# EAGLE board Chronograph Rough Draft Schematic (EAGLE 9.5.1)
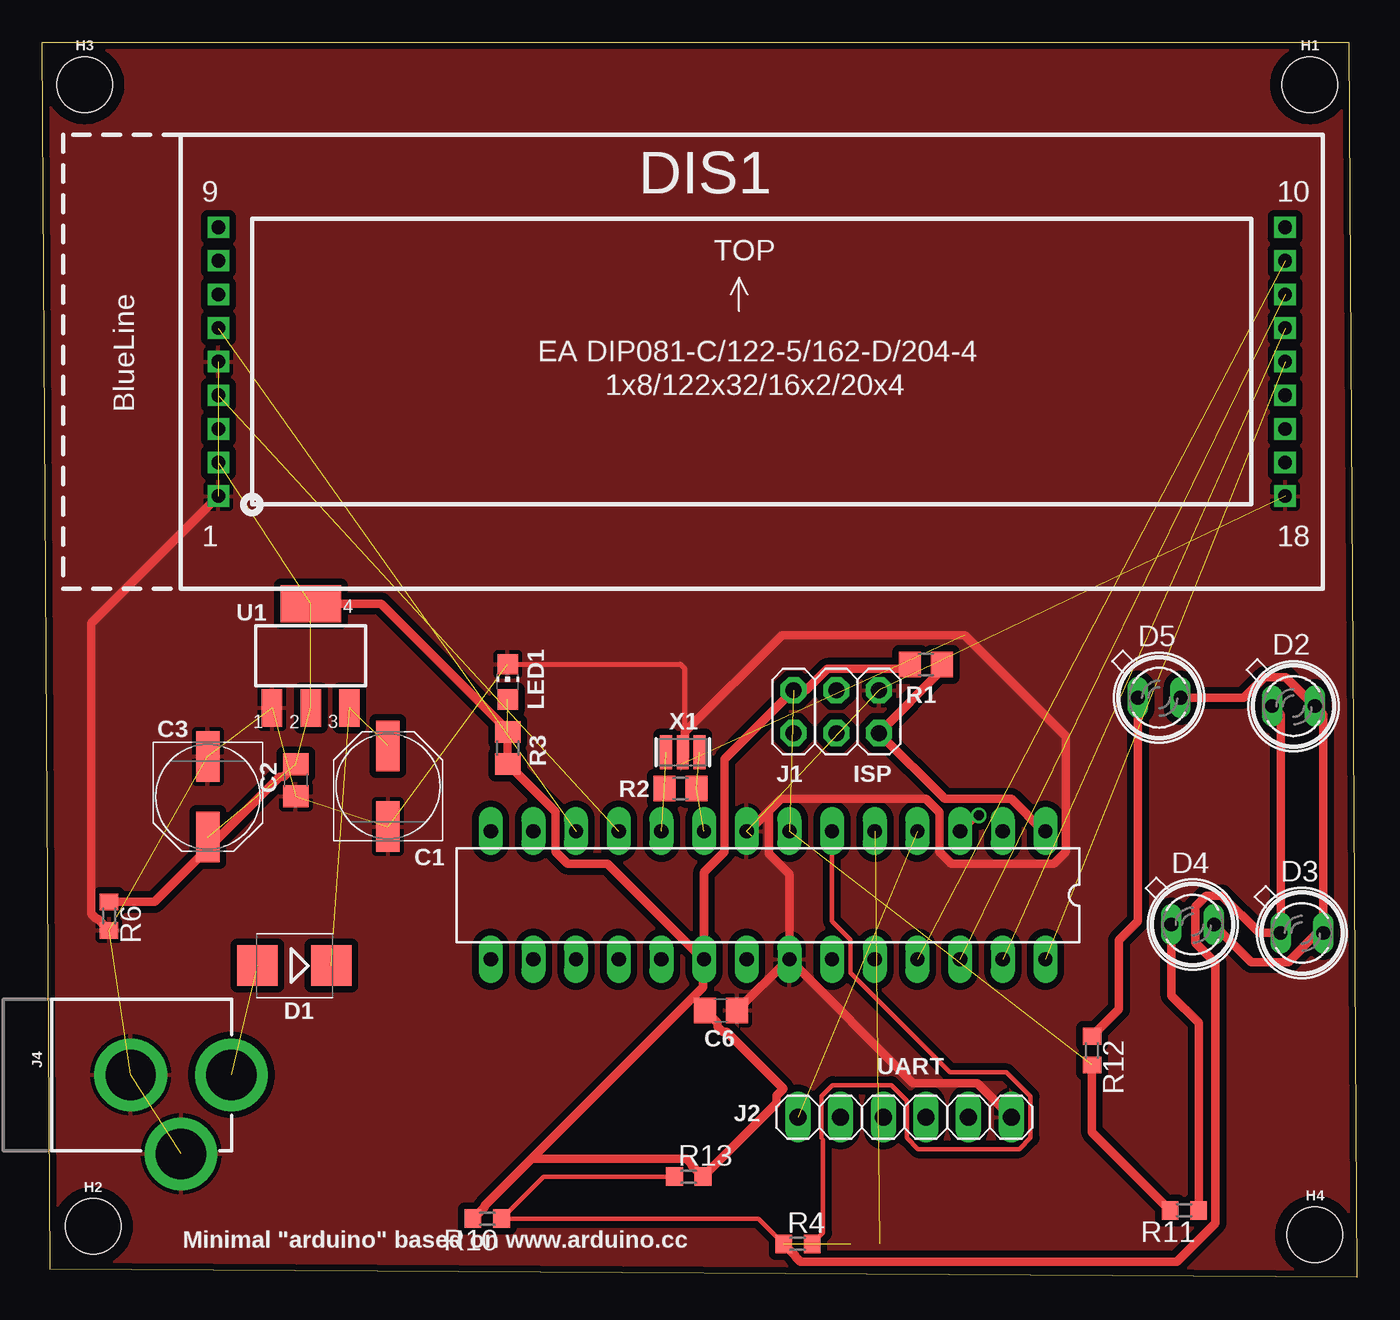
[diagram p0: board, top side]
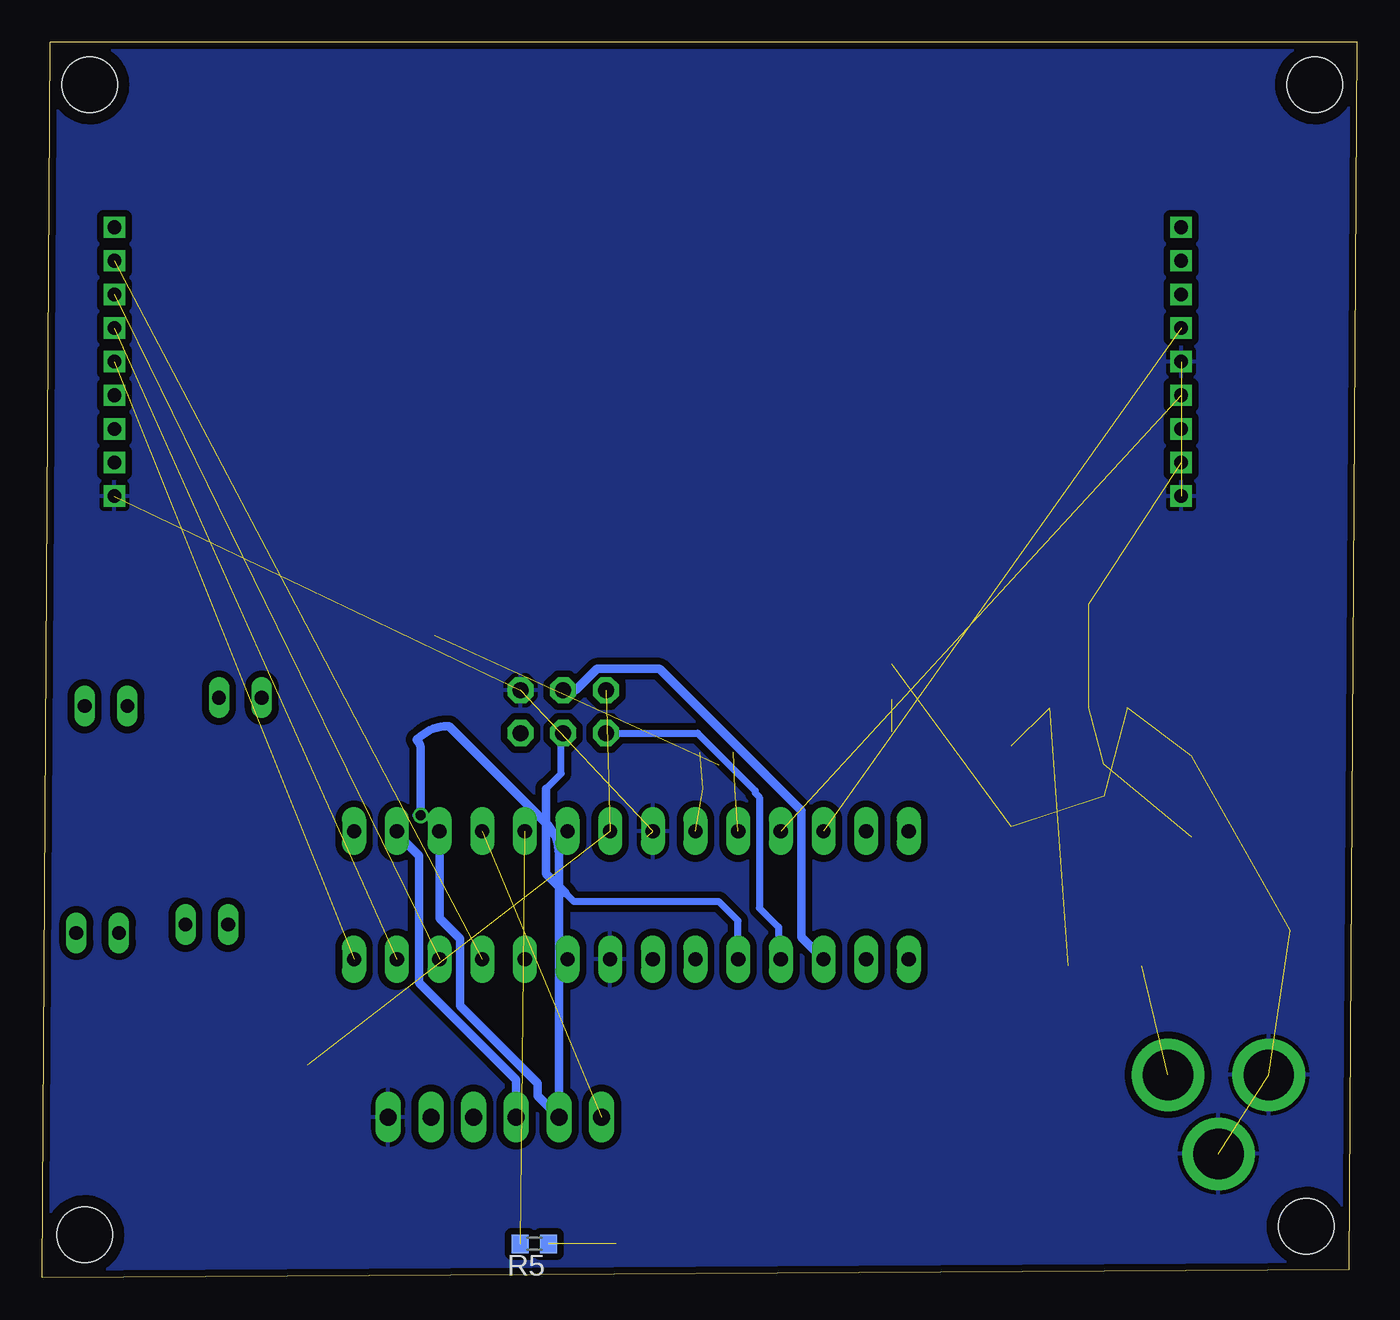
[diagram p1: board, bottom side, seen from below]

Size 78.31 x 73.52 mm. Coordinates in mm from the lower left corner, seen from the top.
Outline: 0.5,0.5 0,73.52 77.81,73.52 78.31,0 0.5,0.5
Copper layers (1*16): Top 0.035559375mm / dielectric 1.6mm / Bottom 0.035559375mm
Design rules "oshpark-2layer": minimum track width 6mil, minimum drill 10mil, track to track 6mil, track to pad 6mil, pad to pad 6mil, via to via 6mil, smd to smd 6mil, copper to edge 15mil, drill to drill 6mil, minimum pad ring 5mil, minimum via ring 5mil, stop-mask expansion 2.5mil, vias tented up to drill 0mil, thermal gap 10mil
Net classes: 0 default: width 0.254 mm, clearance 0.254 mm; 1 power: width 0.61 mm, drill 0.61 mm, clearance 0.254 mm; 2 gnd: width 0.305 mm, drill 0.559 mm, clearance 0.254 mm; 3 usbvcc: width 0.508 mm, drill 0.61 mm, clearance 0.254 mm; 4 aref: width 0.406 mm, drill 0.61 mm, clearance 0.254 mm

## Footprints (pad centres in the part's own frame; a part is rotated, then mirrored left to right if it is on the bottom)
PANASONIC_D = smd 3 x 1.4: + 2.4,0; - -2.4,0
C0805 = smd 1.3 x 1.5: 1 -0.95,0; 2 0.95,0
SMB = smd 2.4 x 2.4: A 2.2,0; C -2.2,0
SFH482 = drill 0.813 long: A -1.27,0; K 1.27,0
EA_DIP = drill 0.813 pad 1.27 square: 1 0,0; 2 0,2; 3 0,4; 4 0,6; 5 0,8; 6 0,10; 7 0,12; 8 0,14; 9 0,16; 10 63.5,16; 11 63.5,14; 12 63.5,12; 13 63.5,10; 14 63.5,8; 15 63.5,6; 16 63.5,4; 17 63.5,2; 18 63.5,0
STAND-OFF = hole 3.302: 0,0
2X03 = drill 0.95 pad 1.55 octagon: 1 -2.54,-1.27; 2 -2.54,1.27; 3 0,-1.27; 4 0,1.27; 5 2.54,-1.27; 6 2.54,1.27
1X06 = drill 1.016 long: 1 -6.35,0; 2 -3.81,0; 3 -1.27,0; 4 1.27,0; 5 3.81,0; 6 6.35,0
POWER_JACK_PTH = drill 2.997 pad 4.318: GND 0,7.7; GNDBREAK 4.7,10.7; PWR 0,13.7
CHIP-LED0805 = smd 1.2 x 1.2: A 0,-1.05; C 0,1.05
R0805 = smd 1.3 x 1.5: 1 -0.95,0; 2 0.95,0
R0603 = smd 1 x 1.1: 1 -0.85,0; 2 0.85,0
SOT223 = smd 1.219 x 2.235: 1 -2.311,-3.099; 2 0,-3.099; 3 2.311,-3.099 | smd 3.6 x 2.2: 4 0,3.099
DIL28-3 = drill 0.85 pad 1.422 long: 1 -16.51,-3.81; 2 -13.97,-3.81; 3 -11.43,-3.81; 4 -8.89,-3.81; 5 -6.35,-3.81; 6 -3.81,-3.81; 7 -1.27,-3.81; 8 1.27,-3.81; 9 3.81,-3.81; 10 6.35,-3.81; 11 8.89,-3.81; 12 11.43,-3.81; 13 13.97,-3.81; 14 16.51,-3.81; 15 16.51,3.81; 16 13.97,3.81; 17 11.43,3.81; 18 8.89,3.81; 19 6.35,3.81; 20 3.81,3.81; 21 1.27,3.81; 22 -1.27,3.81; 23 -3.81,3.81; 24 -6.35,3.81; 25 -8.89,3.81; 26 -11.43,3.81; 27 -13.97,3.81; 28 -16.51,3.81
RESONATOR = smd 0.7 x 2: 1 -1,0; 2 0,0; 3 1,0

## Placement (x,y rotation side)
C1  47u  [PANASONIC_D]  20.6,29.23 90 top
C2  100n  [C0805]  15.11,29.59 90 top
C3  47u  [PANASONIC_D]  9.87,28.61 270 top
C6  100n  [C0805]  40.43,15.89 180 top
D1  M7  [SMB]  15.03,18.56 180 top
D2  SFH482  [SFH482]  74.5,34 0 top
D3  SFH482  [SFH482]  75,20.5 0 top
D4  SFH482  [SFH482]  68.5,21 0 top
D5  SFH482  [SFH482]  66.5,34.5 0 top
DIS1  EA_DIP  [EA_DIP]  10.5,46.5 0 top
H1  STAND-OFF  [STAND-OFF]  75.47,70.98 0 top
H2  STAND-OFF  [STAND-OFF]  3.04,3.04 0 top
H3  STAND-OFF  [STAND-OFF]  2.54,70.98 0 top
H4  STAND-OFF  [STAND-OFF]  75.77,2.54 0 top
J1  3x2 M  [2X03]  47.28,33.67 0 top
J2  [1X06]  51.35,9.54 0 top
J4  POWER_JACK  [POWER_JACK_PTH]  -2.42,12.06 270 top
LED1  GREEN  [CHIP-LED0805]  27.73,35.45 0 top
R1  10K  [R0805]  52.63,36.47 180 top
R2  1M  [R0805]  38.01,29.1 180 top
R3  1K  [R0805]  27.73,31.51 270 top
R4  [R0603]  45,2 0 top
R5  [R0603]  49,2 180 bottom
R6  10K  [R0603]  4,21.5 270 top
R10  [R0603]  26.5,3.5 180 top
R11  [R0603]  68,4 180 top
R12  [R0603]  62.5,13.5 270 top
R13  [R0603]  38.5,6 0 top
U1  NCP1117ST50T3G  [SOT223]  16,37 0 top
U4  ATMEGA328P-PU  [DIL28-3]  43.22,22.75 180 top
X1  CSTCE16M0V53-R0 16MHZ  [RESONATOR]  38.14,31.26 0 top

## Library data of the parts
C1-C3 C6 R1-R3 = rcl
D1 = diode
D2-D5 LED1 = led
DIS1 = display-lcd
H1-H4 = SparkFun-Hardware
J1 U4 X1 = SmartPrj
J2 = pinhead
J4 = SparkFun-Connectors; PROD_ID: CONN-08197
R4-R6 R10-R13 = rcl; SPICEPREFIX: R
U1 = linear

## Nets
0: D2.K D3.K D4.K D5.K
+3V3: DIS1.17
+5V [usbvcc]: C2.2 C3.+ C6.2 DIS1.2 J1.2 R1.2 R3.2 R6.1 R10.2 R11.2 R12.2 R13.2 U1.2 U1.4 U4.7 U4.20
GND [gnd]: C1.- C2.1 C3.- C6.1 DIS1.1 DIS1.5 DIS1.18 J1.6 J2.6 J4.GND J4.GNDBREAK LED1.C R6.2 U1.1 U4.8 U4.22 X1.2
MISO: J1.1 U4.18
MOSI: J1.4 U4.17
N$1: DIS1.14 U4.28
N$2: DIS1.13 U4.27
N$3: LED1.A R3.1
N$4: DIS1.12 U4.26
N$5: DIS1.11 U4.25
N$6: DIS1.6 U4.12
N$7: DIS1.4 U4.11
N$8: D4.A R11.1
N$9: R5.2 U4.5
N$10: D2.A D3.A R4.1 R5.1 R10.1 R13.1
N$11: R4.2 U4.6
N$12: D5.A R12.1
N$13: J2.1 U4.4
PWRIN [power]: D1.A J4.PWR
RESET: J1.5 R1.1 U4.1
RXD: J2.3 U4.2
SCK: J1.3 U4.19
TXD: J2.2 U4.3
VEE: DIS1.3
VIN [power]: C1.+ D1.C U1.3
XTAL1: R2.1 U4.9 X1.3
XTAL2: R2.2 U4.10 X1.1

## Tracks (layer width: path | path; a pad name or v marks a point on that pad's centre or on a via)
0
  Top 0.508: D5.K 71.54,34.5 72.77,35.73 74.04,35.73 D2.K 76.27,33.5 D3.K 75.92,20.5 74.19,18.77 72,18.77 D4.K
+5V  (6 unrouted)
  Top 0.508: U1.4 20.19,40.1 27.73,32.56 R3.2 30.57,27.72 30.57,25.34 31.29,24.63 33.66,24.63 39.35,18.94 | 39.35,18.94 U4.20 39.41,24.12 40.63,25.34 40.63,30.82 J1.2 45.47,34.94 46.75,36.22 51.43,36.22 R1.2 | R11.2 62.5,8.65 R12.2 | C6.2 40.22,15.15 40.22,14.93 40.52,14.63 40.73,14.63 44.13,11.23 43.73,10.83 43.73,10.38 R13.2 38.66,6.69 38.66,6.76 38.36,7.06 29.14,7.06 | 29.14,7.06 26.34,4.26 26.34,4.19 R10.2 | 39.35,18.94 39.35,17.27 29.14,7.06 | C2.2 14.37,29.8 14.15,29.8 6.71,22.35 R6.1
GND  (12 unrouted)
  Top 0.305: LED1.C 38,36.5 38.25,36.25 38.25,32.25 38,32 38,31.4 X1.2
  Top 0.508: J2.6 56.43,10.81 56.43,10.83 55.68,11.57 51.86,11.57 U4.22 | C6.1 44.42,18.94 U4.22 | U4.22 44.49,24.01 43.27,25.23 43.27,27.77 | 43.27,27.77 43.98,28.49 52.62,28.49 53.43,27.67 53.43,25.34 54.15,24.63 60.23,24.63 60.95,25.34 60.95,32.22 54.94,38.23 44.05,38.23 38.28,32.47 38.28,30.78 38,30.5 | 43.27,27.77 42.25,26.75 42.25,26.25 | R6.2 3.31,21.34 3.24,21.34 2.94,21.64 2.94,38.94 DIS1.1
  pour Bottom (isolate 0.406, rank 2): 0,73.52 78.31,73.52 78.31,0 1.25,0 0,1.25
  pour Top (isolate 0.406, rank 2): 0.19,73.52 78.31,73.52 78.31,0 0.5,0
MISO
  Bottom 0.406: J1.1 39.28,32.4 35.85,28.97 35.85,28.84 35.6,28.59 35.6,21.99 34.46,20.84 34.46,19.07 U4.18
MOSI
  Bottom 0.508: U4.17 33.11,20.26 33.11,27.77 41.56,36.22 45.27,36.22 46.56,34.94 J1.4
N$1  (1 unrouted)
N$2  (1 unrouted)
N$3  (1 unrouted)
N$4  (1 unrouted)
N$5  (1 unrouted)
N$6  (1 unrouted)
N$7  (1 unrouted)
N$8
  Top 0.508: R11.1 68.85,15.15 67.23,16.77 D4.A
N$9  (1 unrouted)
N$10  (1 unrouted)
  Top 0.254: R13.1 29.85,6 R10.1 42.65,3.5 R4.1
  Top 0.508: D2.A 73.73,33.5 D3.A 72.46,20.5 70.23,22.73 69.31,22.73 68.65,22.07 68.65,19.93 69.86,18.72 69.86,3.24 67.56,0.94 45.14,0.94 44.84,1.24 44.84,1.31 R4.1
N$11
  Top 0.254: R4.2 46.5,2.65 46.5,8.2 46.4,8.3 46.4,10.78 47.06,11.45 50.55,11.45 51.48,10.52 51.48,8.3 52.15,7.63 58.17,7.63 58.84,8.3 58.84,10.78 57.41,12.21 54.05,12.21 48.12,18.13 48.12,20.1 47.03,21.19 U4.6
N$12
  Top 0.508: D5.A 65.23,21.19 64.11,20.07 64.11,15.96 R12.1
N$13  (1 unrouted)
PWRIN  (1 unrouted)
RESET
  Top 0.508: R1.1 53.58,36.15 J1.5 53.74,28.49 57.7,28.49 59.62,26.56 U4.1
RXD
  Bottom 0.406: 57.32,26.56 57.19,26.68 U4.2
  Bottom 0.508: J2.3 50.08,11.75 55.87,17.55 55.87,25.11 57.32,26.56
SCK
  Bottom 0.406: U4.19 36.87,21.22 38.01,22.37 46.65,22.37 47.14,22.86 | 48.3,29.1 47.41,29.99 47.41,32.27 J1.3
  Bottom 0.508: 48.3,29.1 48.3,24.02 47.14,22.86
TXD  (via drill 0.61)
  Top 0.508: U4.3 55.47,27.38 arc-45 v55.77,27.5
  Bottom 0.406: U4.3 54.78,26.68 54.78,26.43 U4.3
  Bottom 0.508: U4.3 54.65,21.37 53.43,20.15 53.43,16.19 48.81,11.56 48.81,10.81 J2.2 47.54,25.21 arc-45 48.28,27.01 54.07,32.8 54.15,32.8 arc-45 55.95,32.05 56,32 arc45 55.77,31.44 v55.77,27.5 56,27.5
VIN  (2 unrouted)
XTAL1  (2 unrouted)
XTAL2  (2 unrouted)

## Text on the board
tPlace: ISP | UART
tNames: Minimal "arduino" based on www.arduino.cc
214bmp: D:/SmartProjects/Snc/a4_bn_logo2.bmp